# Altium PCB PI.PcbDoc
Units mm, origin at the board's own origin, x right, y up, seen from the top; angles counter-clockwise.
Board outline 35 x 51.56 mm, 2 copper layers (Top Layer, Bottom Layer); 30 components, 51 nets, 197 pads, 34 vias.
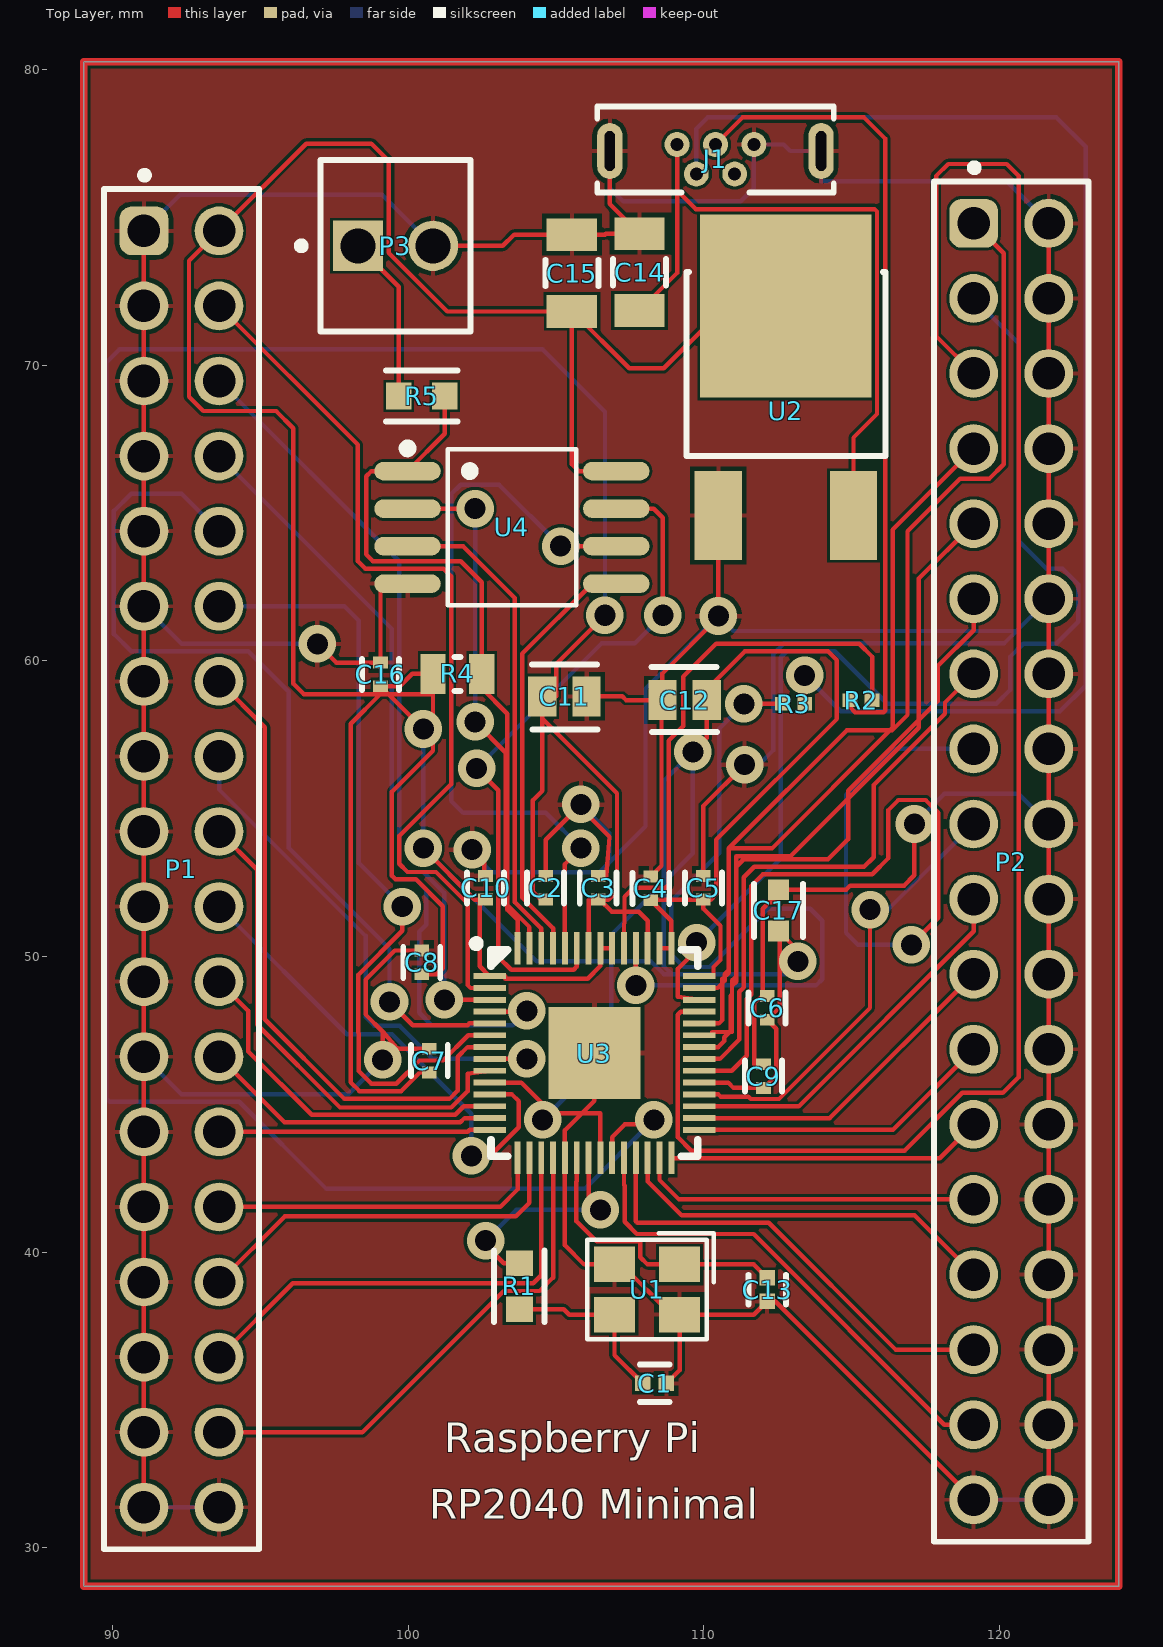
[diagram p0: Top Layer view]
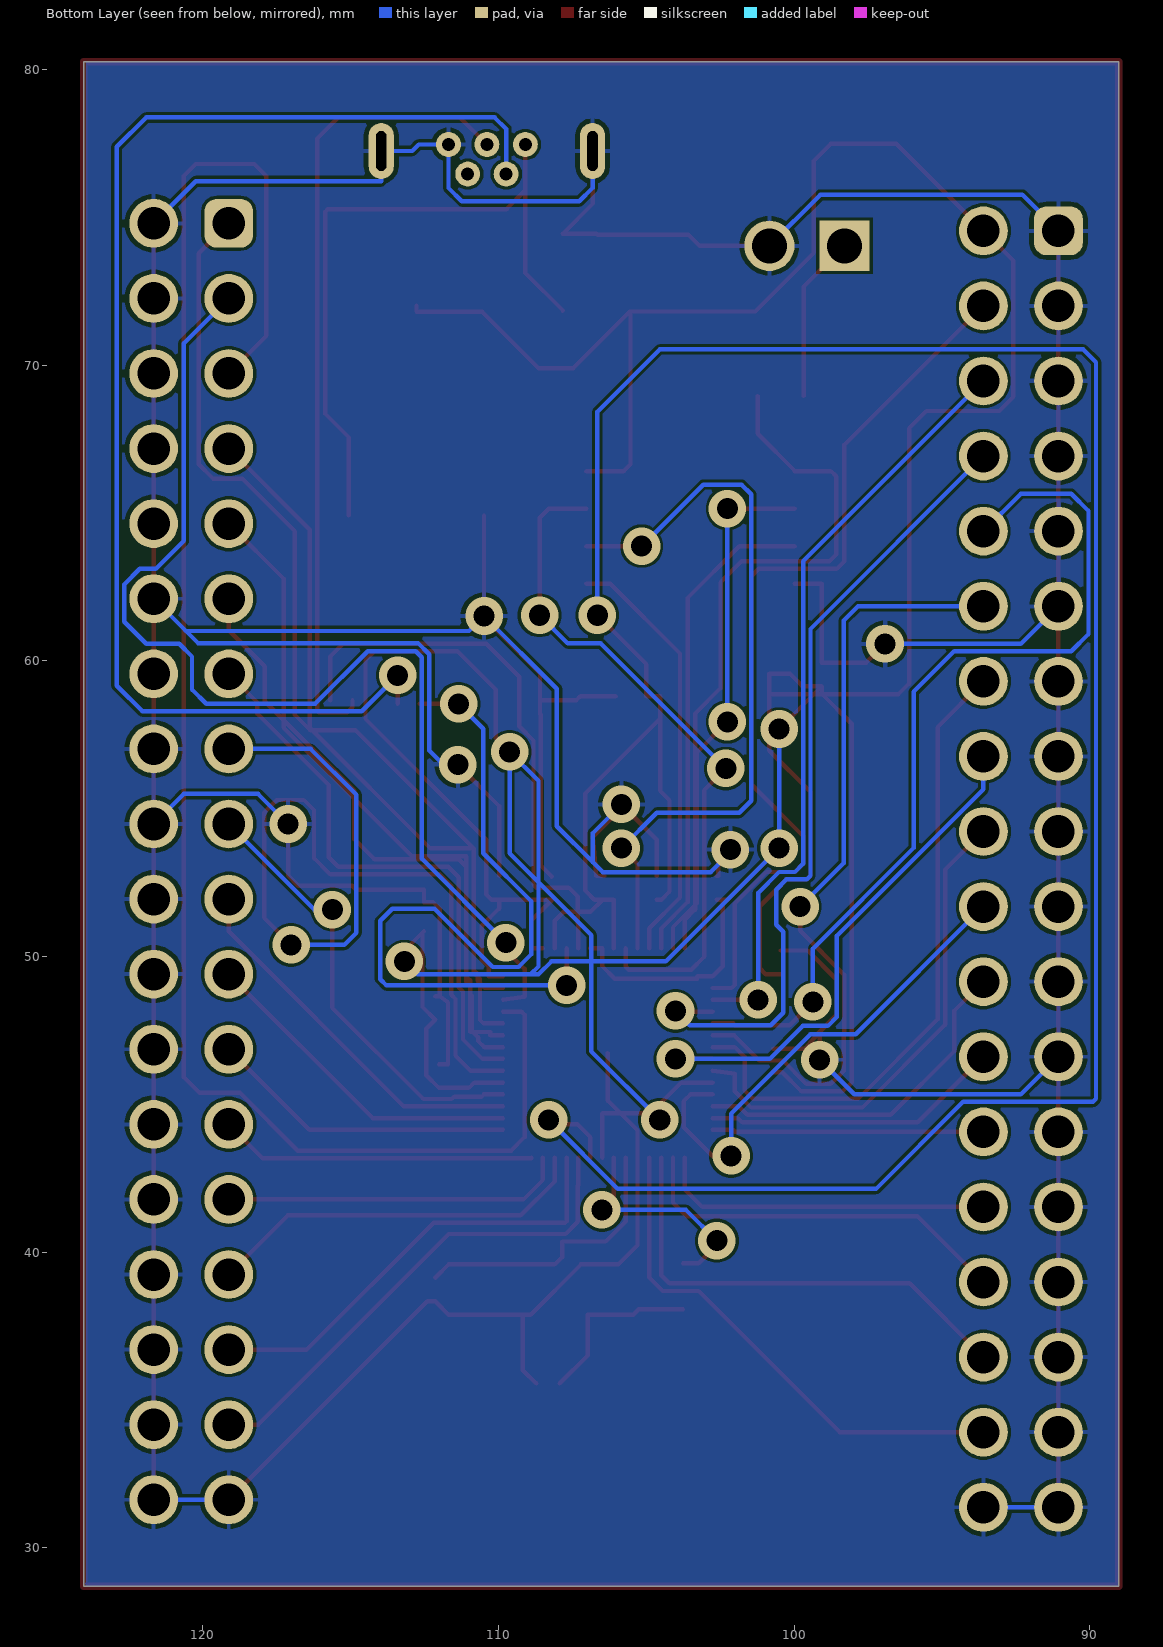
[diagram p1: Bottom Layer view, seen from below]
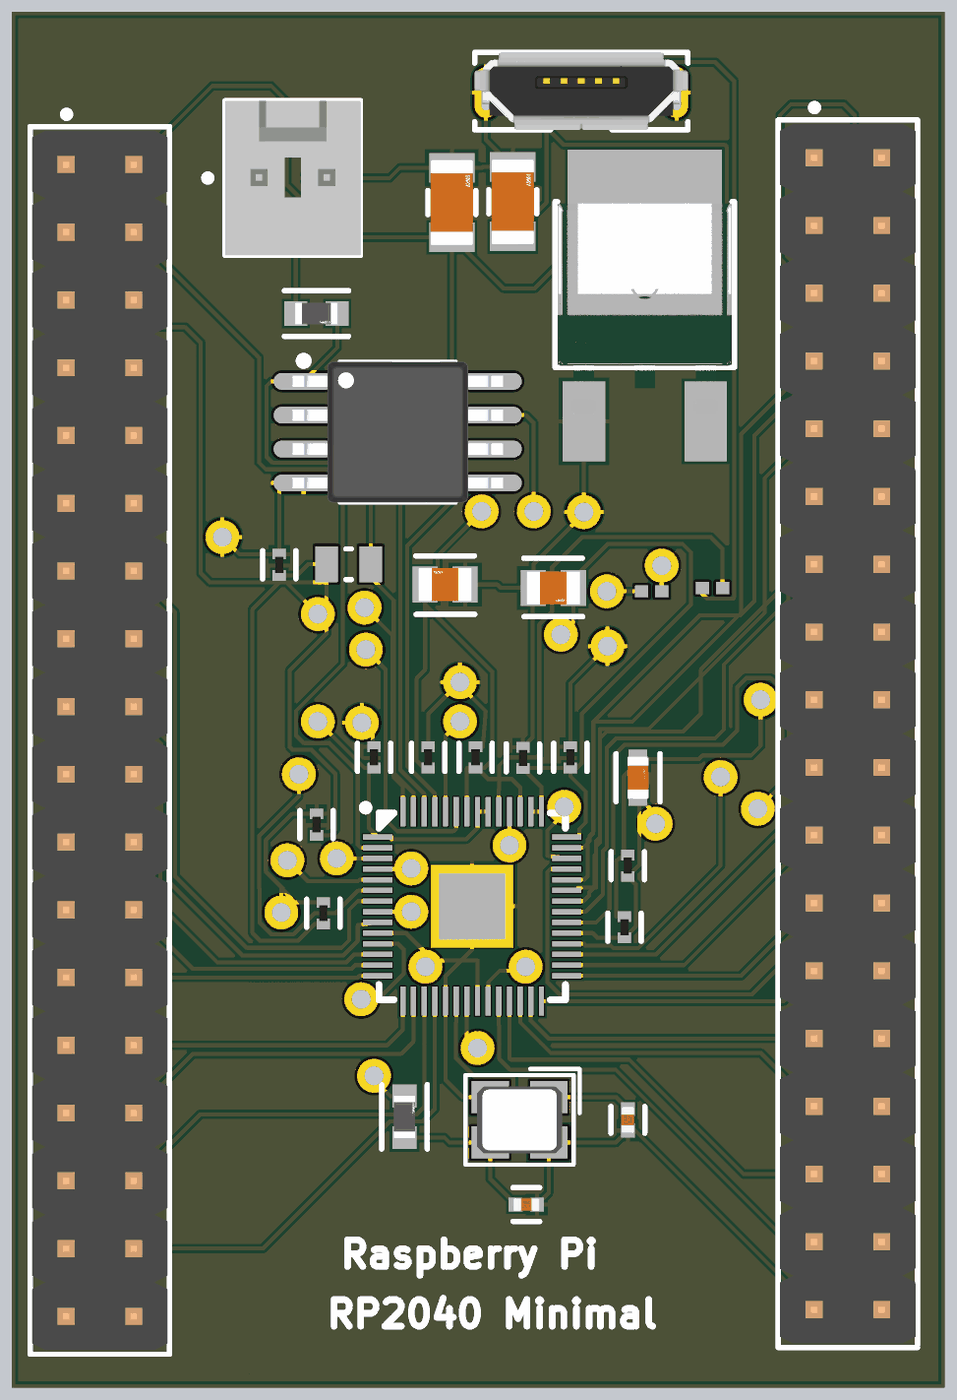
[diagram p2: 3D render of the assembled board from above, using the file's embedded part models]

## Layer stack, top to bottom
Top Solder: solder mask 0.0102, Solder Resist, Dk 3.5
Top Layer: signal copper 0.0356
Dielectric 1: dielectric 0.32, FR-4, Dk 4.8
Bottom Layer: signal copper 0.0356
Bottom Solder: solder mask 0.0102, Solder Resist, Dk 3.5

## Board outline
89.027,28.702 89.027,80.264 124.027,80.264 124.027,28.702

## Design rules (kind name [scope] priority, off if disabled: settings)
Clearance [All] p1: gap=0.1 ignorepadtopadclearanceinfootprint=FALSE
DiffPairsRouting [All] p1: maxlimit=0.254 minlimit=0.15 mostfreqgap=0.15 toplayer_minwidth=0.2 toplayer_maxwidth=0.25 toplayer_prefwidth=0.2 bottomlayer_minwidth=0.2 bottomlayer_maxwidth=0.25 bottomlayer_prefwidth=0.2 maxuncoupledlength=12.7
HoleToHoleClearance [All] p1: gap=0.15 allowstackedmicrovias=TRUE
MinimumSolderMaskSliver [All] p1: minsoldermaskwidth=0.15
PlaneClearance [All] p1: clearance=0.2
PlaneConnect [All] p1: planeconnectstyle=Direct reliefexpansion=0.508 reliefentries=4 reliefconductorwidth=0.254 reliefairgap=0.254
PolygonConnect [All] p1: connectstyle=Relief reliefconductorwidth=0.15 reliefentries=4 polygonreliefangle="90 Angle" airgapwidth=0.15
RoutingCorners [All] p1: cornerstyle=45-Degree minsetback=0.1 maxsetback=0.15
RoutingVias [All] p1: holewidth=0.711 width=1.27 viastyle="Through Hole" minholewidth=0.711 minwidth=1.27 maxholewidth=0.711 maxwidth=1.27
ShortCircuit [All] p1: allowed=TRUE
SilkToSilkClearance [All] p1: silktosilkclearance=0.15
SilkToSolderMaskClearance [IsPad] p1: minsilkscreentomaskgap=0.15 clearancetoexposedcopper=TRUE
SolderMaskExpansion [All] p1: expansion=0.102 istentingtop=FALSE
SupplyNets "Schematic Supply Nets_3" [InNet('+3v3')] p1: voltage=0.000
SupplyNets "Schematic Supply Nets_2" [InNet('VBUS')] p2: voltage=0.000
SupplyNets "Schematic Supply Nets_1" [InNet('+1v1')] p3: voltage=0.000
SupplyNets "Schematic Supply Nets" [InNet('GND')] p4: voltage=0.000
UnRoutedNet [All] p1: checkbadconnections=TRUE
Width [All] p1: maxlimit=0.2 minlimit=0.1 preferedwidth=0.15
20 further rules are at their usual default settings.

## Components (designator, comment, footprint, x,y, rotation, side; value= is the part's Value field where it differs from the comment)
C1 "15pF" FP-C0402-BB-MFG 108.331,35.56 r180 top value="15 pF"
C2 "100nF" FP-GRM15-MFG 104.648,52.324 r270 top value=0.10μF
C3 "100nF" FP-GRM15-MFG 106.426,52.324 r270 top value=0.10μF
C4 "100nF" FP-GRM15-MFG 108.204,52.305 r270 top value=0.10μF
C5 "100nF" FP-GRM15-MFG 109.982,52.324 r270 top value=0.10μF
C6 "100nF" FP-GRM15-MFG 112.141,48.26 r270 top value=0.10μF
C7 "100nF" FP-GRM15-MFG 100.711,46.482 r270 top value=0.10μF
C8 "100nF" FP-GRM15-MFG 100.457,49.803 r270 top value=0.10μF
C9 "100nF" FP-GRM15-MFG 112.014,45.955 r270 top value=0.10μF
C10 "100nF" FP-GRM15-MFG 102.616,52.324 r270 top value=0.10μF
C11 "1uF" FP-C0805C105Z4VACTU-MFG 105.283,58.801 r0 top
C12 "1uF" FP-C0805C105Z4VACTU-MFG 109.347,58.674 r180 top
C13 "15pF" FP-C0402-BB-MFG 112.141,38.735 r90 top value="15 pF"
C14 "10uF" FP-1206-L_3_2_0_2-W_1_6_0-IPC_C 107.823,73.152 r90 top
C15 "10uF" FP-1206-L_3_2_0_2-W_1_6_0-IPC_C 105.537,73.121 r90 top
C16 "100nF" FP-GRM15-MFG 99.06,59.544 r270 top value=0.10μF
C17 "10UF" FP-0603-L_1_6_0_2-W_0_8_0-MFG 112.522,51.562 r90 top
J1 "614105150721" 614105150721 110.393,77.25 r0 top
P1 "61303621121" 61303621121 92.329,52.959 r270 top
P2 "61303621121" 61303621121 120.396,53.213 r270 top
P3 "22-27-2021" MOLX-22-27-2021_V 99.568,74.041 r0 top
R1 "1k" FP-AC0603-IPC_B 103.759,38.847 r90 top
R2 "27 ohm" RESC1005X40X25LL05T10 115.316,58.674 r180 top
R3 "27 ohm" RESC1005X40X25LL05T10 113.036,58.547 r0 top
R4 "DNF" RESC2013X50X30LL20T20 101.663,59.563 r180 top
R5 "1k" FP-AC0603-IPC_B 100.457,68.961 r0 top
U1 "ABM8-272-T3" CRYSTAL-SMD_4P-L3.2-W2.5-BL 108.077,38.735 r180 top
U2 "NCP1117DT33RKG" FP-369C-MFG 112.776,69.219 r0 top
U3 "RP2040" LQFN-56_L7.0-W7.0-P0.4-EP 106.299,46.736 r0 top
U4 "W25Q128JVSIQ" SOIC-8_L5.3-W5.3-P1.27-LS8.0-BL 103.505,64.516 r270 top

## Footprints (in the part's own frame and the unit in brackets; to place one, negate y for a bottom-side part, rotate by r counter-clockwise, add the part's x,y. Pads: shape width x height; smd on the part's side, far side on the other; paste and mask are expansions set on the pad)
61303621121 [mm] "Pin Header, pitch 2.54 mm, THT, Vertical, dual row, 36p"
  rrect50% 1.65x1.65 hole 1.1: 1(-21.59,-1.27)
  round 1.65 hole 1.1: 2(-21.59,1.27) 3(-19.05,-1.27) 4(-19.05,1.27) 5(-16.51,-1.27) 6(-16.51,1.27) 7(-13.97,-1.27) 8(-13.97,1.27) 9(-11.43,-1.27) 10(-11.43,1.27) 11(-8.89,-1.27) 12(-8.89,1.27) 13(-6.35,-1.27) 14(-6.35,1.27) 15(-3.81,-1.27) 16(-3.81,1.27) 17(-1.27,-1.27) 18(-1.27,1.27) 19(1.27,-1.27) 20(1.27,1.27) 21(3.81,-1.27) 22(3.81,1.27) 23(6.35,-1.27) 24(6.35,1.27) 25(8.89,-1.27) 26(8.89,1.27) 27(11.43,-1.27) 28(11.43,1.27) 29(13.97,-1.27) 30(13.97,1.27) 31(16.51,-1.27) 32(16.51,1.27) 33(19.05,-1.27) 34(19.05,1.27) 35(21.59,-1.27) 36(21.59,1.27)
  silkscreen extent -23.59,-2.61 23.01,2.61, body extent -22.86,-2.54 22.86,2.54, height 8.59
614105150721 [mm] "Micro USB 2.0 Type B Vertical 5 Contacts"
  round 0.84 hole 0.44: 1(-1.3,0.22) 2(-0.65,-0.78) 3(0,0.22) 4(0.65,-0.78) 5(1.3,0.22)
  oval 0.85x1.9 hole 0.35 slot 1.35 at 90 deg: Shell(-3.575,0) Shell(3.575,0)
  silkscreen extent -4,-1.4 4,1.5, body extent -4,-1.4 4,1.5, height 5.64
CRYSTAL-SMD_4P-L3.2-W2.5-BL [mm]
  rect 1.4x1.2 smd: 1(-1.1,-0.85) 2(1.1,-0.85) 3(1.1,0.85) 4(-1.1,0.85)
  silkscreen extent -2.26,-1.91 2.03,1.68, body extent -1.6,-1.25 1.6,1.25, height 0.7
FP-369C-MFG [mm]
  rect 1.6x3 smd paste+0 mask+0: 1(-2.285,-4.3) 3(2.285,-4.3)
  rect 5.8x6.2 smd paste+0 mask+0: 4(0,2.79)
  silkscreen extent -3.36,-2.29 3.36,3.93, body extent -3.46,-5.9 3.46,5.99, height 0.25
FP-0603-L_1_6_0_2-W_0_8_0-MFG [mm]
  rect 0.7x0.7 smd paste+0 mask+0: 1(-0.7,0) 2(0.7,0)
  silkscreen extent -0.9,-0.82 0.9,0.82, body extent -1.15,-0.6 1.15,0.6, height 0.25
FP-1206-L_3_2_0_2-W_1_6_0-IPC_C [mm]
  rect 1.105x1.706 smd paste+0 mask+0: 1(-1.301,0) 2(1.301,0)
  silkscreen extent -0.45,-0.9 0.45,0.9, body extent -1.95,-1 1.95,1, height 0.25
FP-AC0603-IPC_B [mm]
  rect 0.859x0.912 smd paste+0 mask+0: 1(-0.777,0) 2(0.777,0)
  silkscreen extent -1.21,-0.86 1.21,0.86, body extent -1.46,-0.71 1.46,0.71, height 0.25
FP-C0402-BB-MFG [mm]
  rect 0.52x0.52 smd paste+0 mask+0: 1(-0.4,0) 2(0.4,0)
  silkscreen extent -0.5,-0.64 0.5,0.64, body extent -0.8,-0.4 0.8,0.4, height 0.25
FP-C0805C105Z4VACTU-MFG [mm]
  rect 0.95x1.35 smd paste+0 mask+0: 1(-0.75,0) 2(0.75,0)
  silkscreen extent -1.1,-1.11 1.11,1.07, body extent -1.4,-0.85 1.4,0.85, height 0.25
FP-GRM15-MFG [mm]
  rect 0.4x0.5 smd paste+0 mask+0: 1(-0.4,0) 2(0.4,0)
  silkscreen extent -0.53,-0.62 0.53,0.62, body extent -0.7,-0.38 0.7,0.38, height 0.25
LQFN-56_L7.0-W7.0-P0.4-EP [mm]
  rect 1.1x0.2 smd paste-100 mask+0.05: 1(-3.55,2.6) 2(-3.55,2.2) 3(-3.55,1.8) 4(-3.55,1.4) 5(-3.55,1) 6(-3.55,0.6) 7(-3.55,0.2) 8(-3.55,-0.2) 9(-3.55,-0.6) 10(-3.55,-1) 11(-3.55,-1.4) 12(-3.55,-1.8) 13(-3.55,-2.2) 14(-3.55,-2.6) 29(3.55,-2.6) 30(3.55,-2.2) 31(3.55,-1.8) 32(3.55,-1.4) 33(3.55,-1) 34(3.55,-0.6) 35(3.55,-0.2) 36(3.55,0.2) 37(3.55,0.6) 38(3.55,1) 39(3.55,1.4) 40(3.55,1.8) 41(3.55,2.2) 42(3.55,2.6)
  rect 0.2x1.1 smd paste-100 mask+0.05: 15(-2.6,-3.55) 16(-2.2,-3.55) 17(-1.8,-3.55) 18(-1.4,-3.55) 19(-1,-3.55) 20(-0.6,-3.55) 21(-0.2,-3.55) 22(0.2,-3.55) 23(0.6,-3.55) 24(1,-3.55) 25(1.4,-3.55) 26(1.8,-3.55) 27(2.2,-3.55) 28(2.6,-3.55) 43(2.6,3.55) 44(2.2,3.55) 45(1.8,3.55) 46(1.4,3.55) 47(1,3.55) 48(0.6,3.55) 49(0.2,3.55) 50(-0.2,3.55) 51(-0.6,3.55) 52(-1,3.55) 53(-1.4,3.55) 54(-1.8,3.55) 55(-2.2,3.55) 56(-2.6,3.55)
  rect 3.1x3.1 smd paste-100 mask+0.05: 57(0,0)
  silkscreen extent -4.13,-3.5 3.5,3.83
MOLX-22-27-2021_V [mm] "Header, 2-Leads, Body 5.8x5.08mm"
  rect 1.7x1.7 hole 1.19: 1(-1.27,0)
  round 1.7 hole 1.19: 2(1.27,0)
  silkscreen extent -3.31,-2.9 2.54,2.9, body extent -2.54,-2.9 2.54,2.9, height 11.72
RESC1005X40X25LL05T10 [mm] "Chip Resistor, 2-Leads, Body 1.00x0.50mm, IPC High Density"
  rect 0.5x0.45 smd: 1(-0.375,0) 2(0.375,0)
  body extent -0.53,-0.27 0.53,0.28, height 0.4
RESC2013X50X30LL20T20 [mm] "Chip Resistor, 2-Leads, Body 2.00x1.25mm, IPC High Density"
  rect 0.85x1.35 smd: 1(-0.825,0) 2(0.825,0)
  silkscreen extent -0.1,-0.58 0.1,0.58, body extent -1.1,-0.72 1.1,0.72, height 0.5
SOIC-8_L5.3-W5.3-P1.27-LS8.0-BL [mm]
  oval 0.63x2.25 smd: 1(-1.905,-3.53) 2(-0.635,-3.53) 3(0.635,-3.53) 4(1.905,-3.53) 5(1.905,3.53) 6(0.635,3.53) 7(-0.635,3.53) 8(-1.905,3.53)
  silkscreen extent -2.82,-3.68 2.64,2.18, body extent -2.64,-3.95 2.64,3.95, height 2.16

## Part data
C1 C13: library part CMP-1034-00802-4, "CAP CER 15PF 16V 5% NP0 0402", Capacitance="15 pF", Manufacturer=Kemet, Manufacturer Part Number=C0402C150J4GACTU, Package=C0402-BB, Temperature="-55°C to +125°C", Temperature Characteristic=C0G, Temperature Coefficient=15%, Temperature Range High=+125°C, Temperature Range Low=-55°C, Tolerance=0.05, Voltage Rating="16 V", Automotive=No, Category=Cap, ComponentLink2Description=Datasheet, ComponentLink2URL=https://content.kemet.com/datasheets/KEM_C1002_X7R_SMD.pdf, Device Class L1="Passive Components", Device Class L2=Capacitors, Device Class L3="Ceramic Capacitors", Digikey Description="CAP CER 15PF 16V 5% NP0 0402", Height=0.55mm, Ipc Land Pattern Name=CAPC10050X50, Lead Free=Yes, Material=Ceramic, Mouser Description="Multilayer Ceramic Capacitors MLCC - SMD/SMT 16volts 15pF C0G 5%", Octopart=https://octopart.com/c0402c150j4gactu-kemet-9140080, RoHS=TRUE
C2 C3 C4 C5 C6 C7 C8 C9 C10 C16: library part CMP-2100-03641-2, "CAP CER 0.1UF 16V X7R 0402", Capacitance=0.10μF, Manufacturer=Murata, Manufacturer Part Number=GRM155R71C104KA88D, Package=GRM15, Temperature="-55°C to +125°C", Temperature Characteristic=X7R, Temperature Range High=+125°C, Temperature Range Low=-55°C, Tolerance=10%, Voltage Rating=16Vdc, Category=Cap, ComponentLink2Description=Datasheet, ComponentLink2URL=https://search.murata.co.jp/Ceramy/image/img/A01X/G101/ENG/GRM155R71H471KA01-01A.pdf, Device Class L1="Passive Components", Device Class L2=Capacitors, Device Class L3="Ceramic Capacitors", Digikey Description="CAP CER 0.1UF 16V X7R 0402", Height=0.55mm, Ipc Land Pattern Name=CAPC10050X219, Lead Free=yes, Material=Ceramic, Mouser Description="0402 0.1 uF 16V ±10 % Tolerance X7R SMT Multilayer Ceramic Capacitor", Octopart=https://octopart.com/grm155r71c104ka88d-murata-196880, RoHS=TRUE, Standoff Height=0mm
C11 C12: library part CMP-2007-03241-2, "CAP CER 1UF 16V Y5V 0805", Case Code (Imperial)=0805, Case Code (Metric)=2012, Dielectric=Y5V, Dielectric Material=Ceramic, Max Operating Temperature=85°C, Min Operating Temperature=-30°C, Package Quantity=1, Tolerance=80%, Voltage=16V, Capacitance=1uF, Case/Package=0805, Construction=Flat, Contact Material=Tin, Depth=1.25mm, Dissipation Factor=7%, Height=1.25mm, Lead Free="Lead Free", Lead Pitch=0.75mm, Length=2mm, Mount="Surface Mount", Number of Pins=2, Packaging="Tape and Reel", Radiation Hardening=No, REACH SVHC="No SVHC", RoHS Compliant=Yes, Series=C, Termination=SMD/SMT, Thickness=0.055inch, Voltage Rating=16V, Voltage Rating (DC)=16V, Width=0.049inch
C14 C15: library part CMP-1661-00005-2, "General Purpose Ceramic Capacitor, 1206, 10uF, 10%, X7R, 15%, 16V", Case Code (Imperial)=1206, Case Code (Metric)=3216, Dielectric=X7R, Max Operating Temperature=125°C, Min Operating Temperature=-55°C, Package Quantity=2500, Tolerance=10%, Voltage=16V, Capacitance=10uF, Case/Package=1206, Construction=Flat, Depth=1.6mm, Dissipation Factor=3.5%, Height=1.78mm, Lead Free="Lead Free", Length=3.2mm, Mount="Surface Mount", Number of Pins=2, Packaging="Tape and Reel", Radiation Hardening=No, REACH SVHC="No SVHC", RoHS Compliant=Yes, Series=-, Termination=SMD/SMT, Thickness=0.07inch, Voltage Rating=16V, Voltage Rating (DC)=16V, Width=0.063inch
C17: library part CMP-2000-06226-4, "Multilayer Ceramic Capacitor 10uF 16V X5R 20% SMD 0603 T/R", Capacitance=10uF, Case Code (Imperial)=0603, Case Code (Metric)=1608, Dielectric=X5R, Max Operating Temperature=85°C, Min Operating Temperature=-55°C, Package Quantity=1, Tolerance=20%, Voltage Rating=16V, Case/Package=0603, Construction=Flat, Halogen Free="Halogen Free", Height=0.8mm, Length=0.063inch, Mount="Surface Mount", Packaging="Tape and Reel", RoHS Compliant=Yes, Series=M, Termination=SMD/SMT, Thickness=0.031inch, Voltage Rating (DC)=16V, Width=0.031inch
J1: library part CMP-1502-03250-2, Contact Resistance=30mΩ, Current Rating=1.8A, Insulation Resistance=1GΩ, Max Operating Temperature=85°C, Min Operating Temperature=-40°C, Operating Supply Voltage=30V, Connector Type=USB, Contact Material=Gold, Contact Plating=Gold, Features=Shielded, Gender=Receptacle, Height=5.81mm, Lead Free="Lead Free", Mount="Through Hole, Vertical", NexarPartId=52645111, Number of Contacts=5, Number of Pins=5, Orientation=Vertical, Packaging="Tape and Reel", REACH SVHC=Unknown, RoHS=Compliant, USB Standard="USB 2.0", Voltage Rating=30V
P1 P2: library part CMP-1502-01131-3, Color=Black, Contact Resistance=20mΩ, Current Rating=3A, Operating Supply Voltage=250V, Connector Type="Male Pin", Contact Material=Copper, Contact Mating Length=5.9944mm, Contact Plating=Gold, Gender=Male, Lead Pitch=2.54mm, Mount="Through Hole", NexarPartId=32855576, Number of Contacts=36, Number of Pins=36, Number of Positions=36, Number of Rows=2, Orientation=Vertical, Packaging=Bulk, Pitch=2.54mm, REACH SVHC=Unknown, RoHS=Compliant, Row Spacing=2.54mm, Termination=Solder
P3: library part CMP-2000-05537-1, "Male Header, Pitch 2.54 mm, 1 x 2 Position, Height 11.7 mm, Tail Length 3.56 mm, 0 to 75 degC, RoHS, Bulk", Current - Max=4A, Manufacturer=Molex, Operating temperature=0°Cto+75°C, Package Description="2-Leads Header, Body 5.08 x 5.8 mm, Pitch 2.54 mm", Package Version="Rev. BC, 02/2012", PartNumber=0022272021, Voltage - Max=250V, Contact Material=Tinplatedbrass, Current Rating=4A, Datasheet URL=http://www.molex.com/pdm_docs/sd/022272021_sd.pdf, Datasheet Version="Rev. F, 06/2009", Housing material=Nylon(UL94V-0), Manufacturer URL=http://www.molex.com/, Mounting Technology=ThroughHole, No. of Positions=2, No. of Rows=1, Orientation=Vertical, Package Reference=22-27-2021, Pitch=2.54mm, Voltage Rating=250V
R1 R5: library part CMP-2000-04828-3, "RES 1kΩ 1.00% 0.1W 0603", Case Code (Imperial)=0603, Case Code (Metric)=1608, Max Operating Temperature=155°C, Max Power Dissipation=100mW, Min Operating Temperature=-55°C, Package Quantity=1, Ratings=AEC-Q200, Resistance=1kR, Resistor Type="Thick Film", Temperature Coefficient=100ppm/°C, Tolerance=1%, Voltage Rating=50V, Case/Package=0603, Construction=Rectangular, Depth=0.8mm, Features="Moisture Resistant", Height=0.022inch, Lead Free="Lead Free", Length=0.063inch, Military Standard=Not, Number of Terminations=2, Packaging="Tape and Reel", Power Rating=100mW, RoHS Compliant=Yes, Series=AC, Size Code=0603, Termination=SMD/SMT, Width=0.031inch
R2 R3: library part CMP-2002-07055-1, Manufacturer="Yageo / Phycomp", Part Number=RC0402FR-0727RL
R4: library part CMP-2001-04896-1, Manufacturer="Vishay Dale", Part Number=CRCW08050000Z0EA
U1: library part ABM8-272-T3_C20625731, JLCPCB Part Class="Extended Part", Manufacturer=ABRACON, Add into BOM=yes, Convert to PCB=yes, Datasheet=https://atta.szlcsc.com/upload/public/pdf/source/20240227/A8BE43F636D80F75C9AF5C59EDF21E9A.pdf, Device=ABM8-272-T3_C20625731, LCSC Part Name=ABM8-272-T3, Manufacturer Part=ABM8-272-T3, Supplier=LCSC, Supplier Footprint=SMD3225-4P, Supplier Part=C20625731, Symbol=ABM8-272-T3_C20625731
U2: library part CMP-07128-000036-1, "IC REG LINEAR 3.3V 1A DPAK-3", Case/Package=DPAK, Current Rating=1A, Dropout Voltage=1.07V, Input Bias Current=6mA, Max Input Voltage=20V, Max Operating Temperature=125°C, Min Input Voltage=10V, Min Operating Temperature=0°C, Min Output Voltage=3.3V, Output Voltage Accuracy=1%, Package Quantity=1, Quiescent Current=10mA, Reference Voltage=1.27V, Accuracy=1%, Contact Plating=Tin, Halogen Free="Halogen Free", Height=2.38mm, Lead Free="Lead Free", Length=6.73mm, Max Output Current=1A, Min Current Limit=1A, Mount="Surface Mount", Nominal Output Voltage=3.3V, Number of Outputs=1, Number of Pins=3, Number of Regulators=1, Output Current=1A, Output Type=Fixed, Output Voltage=3.3V, Packaging="Tape and Reel", Polarity=Positive, Radiation Hardening=No, REACH SVHC="No SVHC", Width=6.22mm
U3: library part RP2040_C2040, JLCPCB Part Class="Extended Part", LCSC Part Name=RP2040（RP2B2）, Manufacturer="Raspberry Pi(树莓派)", ADC (Bit)=12bit, Add into BOM=yes, Applications=-, Convert to PCB=yes, CPU Core=-, CPU Maximum Speed=133MHz, Datasheet=https://atta.szlcsc.com/upload/public/pdf/source/20210621/C2040_96F425825606B7957D87DD32E2512CA9.pdf, Device=RP2040_C2040, Manufacturer Part=RP2040, Number of I/O=30, Supplier=LCSC, Supplier Footprint=LQFN-56(7x7), Supplier Part=C2040, Symbol=RP2040
U4: Clock Frequency (fc)=133MHz, JLCPCB Part Class="Basic Part", LCSC Part Name="W25Q128JVSIQ 编带", Manufacturer=WINBOND(华邦), Operating temperature=-40℃~+85℃, Supply Voltage=2.7V~3.6V, Add into BOM=yes, Block Erase Time (tBE)=120ms@(32KB), Convert to PCB=yes, Data Retention - TDR (Year)="20 years", Datasheet=https://atta.szlcsc.com/upload/public/pdf/source/20170316/1489627409956.pdf, Device=W25Q128JVSIQ, Interface Type=SPI, Manufacturer Part=W25Q128JVSIQ, Memory Size=128Mbit, Page Programming Time (Tpp)=700us, Supplier=LCSC, Supplier Footprint=SOIC-8-208mil, Supplier Part=C97521, Symbol=W25Q128JVSIQTR

## Via types
v1: diameter 1.27, hole 0.711, Top Layer to Bottom Layer, 34 vias

## Nets (pads, with @x,y where several pads share a name; then routed paths per layer and width w, separated by ;. In a path a pad name is that pad's centre, name@x,y a point inside that pad or via, vN(x,y) a via of type N, cw(c..) or ccw(c..) an arc to the next point about the centre after c; other vN are vias at no path point)
+1v1: C2.2 C3.2 C11.1 U3.23 U3.45 U3.50 | length 96.5
  Top Layer w0.15: C2.2 104.489,51.924 104.216,52.197 104.216,55.284 104.533,55.601 104.533,58.052 ; U3.50 106.099,51.924 C3.2 C3.2@106.477,51.924 ; v1(106.655,61.544) 105.004,59.893 105.004,58.801 C11.1 104.533,58.052 ; U3.23 106.899,43.891 107.331,44.323 108.204,44.323 108.306,44.425 v1(108.306,44.475) ; U3.45 108.099,51.206 107.794,51.511 106.89,51.511 C3.2@106.477,51.924 ; 104.533,58.052 107.061,55.524 107.061,52.222 106.763,51.924 C3.2@106.477,51.924
  Bottom Layer w0.15: v1(106.655,61.544) 106.655,68.428 104.546,70.536 90.221,70.536 89.789,70.104 89.789,45.187 89.891,45.085 94.285,45.085 97.231,42.139 105.969,42.139 v1(108.306,44.475)
+3v3: C4.2 C5.2 C6.2 C7.2 C8.2 C9.2 C10.2 C12.1 C15.1 C16.2 C17.1 P1.2 R4.2 U2.4 U3.1 U3.10 U3.22 U3.33 U3.42 U3.43 U3.44 U3.48 U3.49 U4.8 | length 182.1
  Top Layer w0.15: C8.2 100.966,49.403 101.168,49.605 101.168,51.703 100.261,52.61 99.568,52.61 99.448,52.73 99.448,55.575 100.838,56.965 100.838,58.877 ; v1(100.508,53.67) 102.254,51.924 C10.2@102.416,51.924 ; v1(100.508,57.696) 99.327,58.877 ; C7.2 100.399,46.082 99.765,45.447 98.349,45.447 98.055,45.741 98.055,57.872 99.06,58.877 ; C10.2 C10.2@102.416,51.924 ; U3.10 103.819,45.736 104.546,45.009 v1@104.546,44.704 ; v1(104.546,44.475) v1@104.546,44.704 ; U3.22 106.499,44.704 v1@104.546,44.704 ; U3.48 U3.49 106.499,49.679 106.07,49.251 103.276,49.251 103.276,49.336 U3.1 102.416,49.669 C10.2@102.416,51.924 ; U4.8 105.766,66.421 105.537,66.65 C15.1 ; U3.44 U3.43 108.899,51.21 C4.2 108.255,51.905 108.274,51.924 C5.2 ; v1(109.626,56.921) 110.097,57.392 C12.1 110.097,59.03 111.39,60.322 114.198,60.322 114.5,60.02 114.5,58.038 110.412,53.95 110.412,52.1 110.236,51.924 C5.2 ; U3.33 110.82,45.736 111.001,45.555 C9.2 112.446,45.987 112.446,47.555 C6.2 112.573,48.292 C17.1@112.573,50.811 ; U3.42 110.326,49.336 110.326,49.646 110.563,49.883 110.563,51.04 109.982,51.621 C5.2 ; C17.1 C17.1@112.573,50.811 ; U2.4 112.776,71.806 110.552,71.806 108.647,69.901 107.478,69.901 105.559,71.82 C15.1 ; v1(113.182,49.835) 113.182,50.202 C17.1@112.573,50.811 ; 99.06,58.877 99.327,58.877 ; 99.06,58.877 96.469,58.877 96.114,59.233 96.114,67.869 95.529,68.453 93.066,68.453 92.583,68.936 92.583,73.533 P1.2 96.545,77.495 98.755,77.495 99.339,76.911 99.339,73.802 101.321,71.82 C15.1 ; 99.06,58.877 C16.2 ; C16.2 99.327,58.877 ; C16.2 99.72,59.144 100.139,59.563 R4.2 100.838,58.877 ; 99.327,58.877 100.838,58.877
  Bottom Layer w0.15: v1(100.508,57.696) v1(100.508,53.67) 104.343,49.835 106.861,49.835 ; v1(104.546,44.475) 106.861,46.79 106.861,49.835 ; v1(113.182,49.835) 112.743,49.396 108.915,49.396 ; 106.861,49.835 106.861,50.727 108.649,52.515 ; 106.861,49.835 108.21,49.835 108.649,49.396 108.915,49.396 ; 108.649,52.515 109.626,53.492 v1(109.626,56.921) 108.649,55.944 108.649,52.515 ; 108.649,52.515 108.649,49.662 108.915,49.396
GND: C1.1 C2.1 C3.1 C4.1 C5.1 C6.1 C7.1 C8.1 C9.1 C10.1 C11.2 C12.2 C13.1 C14.2 C15.2 C16.1 C17.2 J1.5 J1.Shell P1.1 P1.3 P1.5 P1.7 P1.9 P1.11 P1.13 P1.15 P1.17 P1.19 P1.21 P1.23 P1.25 P1.27 P1.29 P1.31 P1.33 P1.35 P1.36 P2.2 P2.4 P2.6 P2.8 P2.10 P2.12 P2.14 P2.16 P2.18 P2.20 P2.22 P2.24 P2.26 P2.28 P2.30 P2.32 P2.34 P2.35 P2.36 P3.2 U1.2 U1.4 U2.1 U3.19 U3.57 U4.4 | length 276.6
  Top Layer w0.15: P1.35 P1.33 P1.31 P1.29 P1.27 P1.25 P1.23 P1.21 P1.19 P1.17 P1.15 P1.13 P1.11 P1.9 P1.7 P1.5 P1.3 P1.1 ; v1(96.926,60.579) 97.561,59.944 C16.1 99.06,62.611 U4.4 ; v1(99.136,46.507) 99.136,47.46 ; C8.1 99.542,50.203 98.555,49.216 98.555,48.041 99.136,47.46 ; C7.1 99.628,46.882 99.606,46.907 99.136,47.46 ; P3.2 103.2,74.041 103.581,74.422 C15.2 106.655,74.422 106.685,74.453 C14.2 106.818,75.458 J1.Shell@106.818,77.25 ; v1(102.159,53.619) 102.565,53.213 102.565,52.724 C10.1 ; C2.1 104.648,53.95 v1@105.562,54.864 ; v1(105.842,55.143) v1@105.562,54.864 ; C11.2 107.239,58.801 107.366,58.674 C12.2 ; U3.57 106.299,45.12 105.299,44.12 U3.19 105.299,40.234 105.948,39.585 U1.2 107.213,39.585 108.913,37.885 U1.4 ; C3.1 106.699,52.724 106.807,54.051 105.994,54.864 v1@105.562,54.864 ; C4.1 108.566,53.067 108.566,58.18 108.597,58.18 C12.2 ; C1.1 109.177,36.006 U1.4 ; C5.1 109.982,55.093 v1(111.379,56.49) ; U2.1 v1(110.491,61.519) 110.491,61.467 108.597,59.573 C12.2 ; C9.1 111.709,46.355 111.709,48.455 C6.1@111.989,48.66 ; C6.1 C6.1@111.989,48.66 ; v1(117.119,54.483) 117.119,52.745 116.772,52.397 114.946,52.397 114.811,52.262 C17.2 112.522,51.841 112.217,51.841 111.989,51.613 C6.1@111.989,48.66 ; P2.35 112.414,38.335 C13.1 111.691,37.885 U1.4 ; P2.36 P2.34 P2.32 P2.30 P2.28 P2.26 P2.24 P2.22 P2.20 P2.18 P2.16 P2.14 P2.12 P2.10 P2.8 P2.6 P2.4 P2.2
  Bottom Layer w0.15: P1.35 P1.36 ; P1.23 92.329,45.339 97.968,45.339 v1(99.136,46.507) ; P1.11 92.329,60.579 v1(96.926,60.579) ; P1.1 92.278,75.768 99.111,75.768 P3.2 ; v1(102.159,53.619) 102.108,53.569 102.819,52.857 106.477,52.857 106.807,53.188 ; v1(105.842,55.143) 106.807,54.178 106.807,53.188 ; J1.Shell@106.818,77.25 106.818,75.997 107.266,75.549 111.245,75.549 111.693,75.997 J1.5 112.7,77.47 112.92,77.25 113.968,77.25 113.968,76.225 120.244,76.225 P2.2 ; v1(111.379,56.49) 111.862,56.49 112.341,56.969 112.341,60.221 112.725,60.604 120.167,60.604 120.574,61.011 ; v1(117.119,54.483) 118.135,55.499 120.65,55.499 P2.18 ; P2.35 P2.36 ; P2.12 120.574,61.011 ; 106.807,53.188 108.026,54.407 108.026,59.054 v1(110.491,61.519) 110.999,61.011 120.574,61.011
GPI00: P1.4 U3.2 | length 30.8
  Top Layer w0.15: P1.4 98.298,67.31 98.298,63.373 98.552,63.119 101.194,63.119 101.448,62.865 101.448,55.829 99.698,54.079 99.698,53.137 99.974,52.86 100.94,52.86 102.006,51.793 102.006,49.038 102.108,48.936 U3.2
GPI01: P1.6 U3.3 | length 25.9
  Top Layer w0.15: v1(101.219,48.536) U3.3
  Bottom Layer w0.15: P1.6 99.698,63.37 99.698,53.137 99.974,52.86 100.511,52.86 101.219,52.152 v1(101.219,48.536)
GPI02: P1.8 U3.4 | length 27.5
  Top Layer w0.15: U3.4 103.991,48.136 v1(104.013,48.158)
  Bottom Layer w0.15: P1.8 99.448,61.08 99.448,52.73 99.568,52.61 100.261,52.61 100.609,52.261 100.609,51.077 100.368,50.835 100.368,48.098 100.787,47.679 103.533,47.679 v1(104.013,48.158)
GPI03: P1.10 U3.5 | length 30.9
  Top Layer w0.15: v1(99.365,48.463) 100.152,47.676 102.006,47.676 102.067,47.736 U3.5
  Bottom Layer w0.15: P1.10 92.329,65.659 90.627,65.659 90.043,65.075 90.043,60.909 90.627,60.325 94.59,60.325 95.961,58.953 95.961,53.67 99.365,50.267 v1(99.365,48.463)
GPI04: P1.12 U3.6 | length 26.7
  Top Layer w0.15: v1(99.797,51.689) 99.797,50.869 98.305,49.378 98.305,47.425 98.326,47.403 98.326,46.126 98.755,45.697 99.596,45.697 100.381,46.482 101.178,46.482 102.032,47.336 U3.6
  Bottom Layer w0.15: P1.12 97.841,61.849 98.323,61.366 98.323,53.162 v1(99.797,51.689)
GPI05: P1.14 U3.7 | length 22.2
  Top Layer w0.15: P1.14 95.148,57.76 95.148,47.875 97.841,45.183 101.393,45.183 101.676,45.466 101.676,46.606 102.006,46.936 U3.7
GPI06: P1.16 U3.8 | length 18.2
  Top Layer w0.15: U3.8 v1(104.013,46.536)
  Bottom Layer w0.15: P1.16 93.599,55.651 98.555,50.696 98.555,47.955 98.857,47.653 99.71,47.653 100.827,46.536 v1(104.013,46.536)
GPI07: P1.18 U3.9 | length 16.9
  Top Layer w0.15: P1.18 94.894,52.934 94.894,47.69 97.691,44.894 101.457,44.894 102.006,45.443 102.006,46.034 U3.9
GPI08: P1.20 U3.11 | length 16.8
  Top Layer w0.15: v1(102.133,43.256) 102.769,43.256 103.734,44.221 103.734,45.11 103.508,45.336 U3.11
  Bottom Layer w0.15: P1.20 97.919,47.369 99.449,47.369 102.133,44.685 v1(102.133,43.256)
GPI09: P1.22 U3.12 | length 11.9
  Top Layer w0.15: P1.22 94.59,48.158 94.59,46.787 96.733,44.644 101.587,44.644 101.879,44.936 U3.12
GPI010: P1.24 U3.13 | length 10.1
  Top Layer w0.15: P1.24 95.814,44.394 101.762,44.394 101.905,44.536 U3.13
GPI011: P1.26 U3.14 | length 9.2
  Top Layer w0.15: P1.26 102.012,44.069 102.079,44.136 U3.14
GPI012: P1.28 U3.15 | length 11.4
  Top Layer w0.15: P1.28 103.108,41.529 103.699,42.12 U3.15
GPI013: P1.30 U3.16 | length 13.1
  Top Layer w0.15: P1.30 95.818,41.208 103.632,41.208 104.099,41.675 U3.16
GPI014: P1.32 U3.17 | length 16
  Top Layer w0.15: P1.32 96.093,38.943 104.225,38.943 104.499,39.218 U3.17
GPI015: P1.34 U3.18 | length 17.5
  Top Layer w0.15: P1.34 98.45,33.909 103.226,38.684 104.445,38.684 104.899,39.138 U3.18
GPI016: P2.27 U3.27 | length 11.6
  Top Layer w0.15: U3.27 108.499,42.443 109.159,41.783 P2.27
GPI017: P2.25 U3.28 | length 10.7
  Top Layer w0.15: U3.28 108.899,43.18 117.983,43.18 P2.25
GPI018: P2.23 U3.29 | length 10.4
  Top Layer w0.15: U3.29 116.399,44.136 P2.23
GPI019: P2.21 U3.30 | length 11.3
  Top Layer w0.15: U3.30 114.259,44.536 P2.21
GPI020: P2.19 U3.31 | length 12.8
  Top Layer w0.15: U3.31 111.333,44.936 111.339,44.93 113.205,44.93 119.126,50.851 P2.19
GPI021: P2.17 U3.32 | length 15.1
  Top Layer w0.15: U3.32 110.493,45.336 110.566,45.263 111.499,45.263 111.582,45.18 112.541,45.18 115.621,48.26 v1(115.621,51.587)
  Bottom Layer w0.15: v1(115.621,51.587) 116.23,51.587 P2.17
GPI022: P2.15 U3.34 | length 33.2
  Top Layer w0.15: U3.34 110.947,46.136 111.455,46.644 111.455,48.564 111.596,48.705 111.596,52.386 111.997,52.787 115.699,52.787 116.243,53.331 116.243,54.956 116.582,55.296 117.5,55.296 117.932,54.864 117.932,51.308 v1(117.018,50.394)
  Bottom Layer w0.15: v1(117.018,50.394) 115.214,50.394 114.808,50.8 114.808,55.474 116.357,57.023 P2.15
GPI023: P2.13 U3.35 | length 19.5
  Top Layer w0.15: U3.35 110.544,46.536 111.201,47.193 111.201,48.81 111.346,48.955 111.346,52.681 111.702,53.037 115.418,53.037 115.743,53.362 115.743,55.803 118.156,58.217 118.156,58.593 P2.13
GPI024: P2.11 U3.36 | length 21.1
  Top Layer w0.15: U3.36 110.487,46.936 110.693,47.142 110.693,47.265 110.9,47.473 110.9,48.666 110.951,48.717 110.951,49.2 110.982,49.2 111.096,49.314 111.096,53.035 111.348,53.287 114.198,53.287 114.884,53.973 114.884,55.612 117.906,58.634 117.906,59.816 119.126,61.036 P2.11
GPI025: P2.9 U3.37 | length 22.9
  Top Layer w0.15: U3.37 110.287,47.336 110.287,47.447 110.951,47.447 110.951,49.001 111.096,49.146 111.096,53.391 112.928,53.391 117.272,57.734 117.272,62.789 P2.9
GPI026_ADC0: P2.7 U3.38 | length 24.5
  Top Layer w0.15: U3.38 110.509,47.736 110.627,47.854 110.627,49.243 110.839,49.455 110.839,53.656 112.305,53.656 116.383,57.734 116.383,64.44 P2.7
GPI027_ADC1: P2.5 U3.39 | length 58.5
  Top Layer w0.15: U3.39 109.22,48.136 109.118,48.034 109.118,43.891 109.576,43.434 116.789,43.434 118.745,45.39 120.117,45.39 120.65,45.923 120.65,76.403 120.244,76.81 118.262,76.81 117.856,76.403 117.856,70.993 P2.5
GPI028_ADC2: P2.3 U3.40 | length 39.1
  Top Layer w0.15: v1(109.753,50.47) 109.753,50.216 109.118,49.581 109.118,48.638 U3.40
  Bottom Layer w0.15: v1(109.753,50.47) 112.598,53.315 112.598,60.122 112.801,60.325 114.427,60.325 116.205,58.547 119.888,58.547 120.371,59.03 120.371,60.147 120.802,60.579 121.92,60.579 122.666,61.325 122.666,62.586 122.133,63.119 121.59,63.119 120.65,64.059 120.65,70.739 P2.3
GPI029_ADC3: P2.1 U3.41 | length 32.4
  Top Layer w0.15: U3.41 110.463,48.936 110.701,49.174 110.701,49.396 110.846,49.54 110.846,53.662 114.832,57.649 116.364,57.649 116.888,58.173 116.888,64.387 118.669,66.167 119.659,66.167 120.142,66.65 120.142,73.787 P2.1
NetC1_2: C1.2 R1.1 U1.3 | length 6
  Top Layer w0.15: R1.1 105.258,38.071 105.443,37.885 U1.3 106.977,36.514 C1.2
NetR2_1: R2.1 U3.47 | length 19.2
  Top Layer w0.15: U3.47 107.299,51.114 107.315,51.13 107.315,52.019 107.62,52.324 108.715,52.324 108.816,52.426 108.816,57.305 109.296,57.785 109.296,59.461 110.414,60.579 115.259,60.579 115.691,60.147 R2.1
NetR3_1: R3.1 U3.46 | length 26.7
  Top Layer w0.15: v1(107.699,49.022) U3.46 ; v1(111.354,58.547) R3.1
  Bottom Layer w0.15: v1(107.699,49.022) 113.792,49.022 114.001,49.231 114.001,51.206 113.594,51.613 112.166,51.613 110.2,49.646 109.322,49.646 108.899,50.069 108.899,51.876 110.515,53.492 110.515,57.709 v1(111.354,58.547)
QSPI_SCLK: U3.52 U4.6 | length 25.6
  Top Layer w0.15: v1(105.156,63.881) U4.6 ; U3.52 105.299,53.127 v1(105.842,53.67)
  Bottom Layer w0.15: v1(105.156,63.881) 103.073,65.964 101.778,65.964 101.448,65.634 101.448,55.27 101.854,54.864 104.648,54.864 v1(105.842,53.67)
QSPI_SD0: U3.53 U4.5 | length 14.5
  Top Layer w0.15: U3.53 104.899,50.955 103.861,51.994 103.861,60.249 106.223,62.611 U4.5
QSPI_SD1: U3.55 U4.2 | length 17.9
  Top Layer w0.15: U4.2 v1(102.26,65.151) ; v1(102.26,57.937) 103.302,56.896 103.302,51.793 104.099,50.996 U3.55
  Bottom Layer w0.15: v1(102.26,57.937) v1(102.26,65.151)
QSPI_SD2: U3.54 U4.3 | length 16.6
  Top Layer w0.15: U4.3 101.854,63.881 103.607,62.128 103.607,51.841 104.499,50.949 U3.54
QSPI_SD3: U3.51 U4.7 | length 23.6
  Top Layer w0.15: v1(102.311,56.363) 103.048,55.626 103.048,49.987 103.48,49.555 105.595,49.555 105.699,49.659 U3.51 ; U4.7 108.306,65.151 108.61,64.846 v1(108.61,61.544)
  Bottom Layer w0.15: v1(102.311,56.363) 106.54,60.592 107.658,60.592 v1(108.61,61.544)
QSPI_SS: R4.1 R5.2 U3.56 U4.1 | length 24.4
  Top Layer w0.15: R5.2 101.234,67.68 U4.1 98.755,66.421 98.577,66.243 98.577,63.602 98.806,63.373 101.778,63.373 102.488,62.663 R4.1 102.488,59.08 103.353,58.216 103.353,51.587 103.699,51.241 U3.56
RUN: P2.29 U3.26 | length 13.1
  Top Layer w0.15: U3.26 108.099,42.39 109.245,41.244 117.125,41.244 P2.29
SWCLK: P2.33 U3.24 | length 16.8
  Top Layer w0.15: U3.24 107.299,42.268 107.319,42.248 107.319,41.026 107.731,40.615 111.684,40.615 118.135,34.163 P2.33
SWD: P2.31 U3.25 | length 15.4
  Top Layer w0.15: U3.25 107.699,41.046 107.752,40.994 112.194,40.994 116.484,36.703 P2.31
USB_BOOT: P3.1 R5.1 | length 5.7
  Top Layer w0.15: P3.1 99.68,72.659 R5.1
USB_D+: J1.3 R2.2 | length 27.3
  Top Layer w0.15: J1.3 111.307,78.384 115.418,78.384 116.129,77.673 116.129,58.318 116.078,58.268 115.113,58.268 114.941,58.439 R2.2
USB_D-: J1.2 R3.2 | length 44.8
  Top Layer w0.15: R3.2 v1(113.411,59.512)
  Bottom Layer w0.15: J1.2 109.743,77.993 110.134,78.384 121.92,78.384 122.916,77.388 122.916,59.162 122.047,58.293 114.63,58.293 v1(113.411,59.512)
VBUS: C14.1 J1.1 U2.3 | length 23.8
  Top Layer w0.15: C14.1 109.093,73.121 109.093,75.921 ; J1.1 109.093,75.921 ; U2.3 115.061,67.555 115.857,68.351 115.857,75.202 115.773,75.286 109.728,75.286 109.093,75.921
XIN: C13.2 U1.1 U3.20 | length 9.7
  Top Layer w0.15: U3.20 105.699,42.393 105.689,42.383 105.689,41.046 106.376,40.36 107.852,40.36 107.852,39.827 108.094,39.585 U1.1 111.691,39.585 C13.2
XOUT: R1.2 U3.21 | length 7.8
  Top Layer w0.15: v1(102.616,40.386) 102.616,40.234 103.226,39.624 R1.2 ; U3.21 106.099,41.831 v1(106.502,41.427)
  Bottom Layer w0.15: v1(102.616,40.386) 103.657,41.427 v1(106.502,41.427)
pads on no net: J1.4
copper on no net: | length 173.1
  Top Layer w0.254: 89.027,28.702 124.027,28.702 124.027,80.264 89.027,80.264 89.027,28.702

## Polygon pours and split planes (outlines as drawn)
GND on Top Layer "GND_L01_P000" (solid, pour order 0): 89.027,80.264 124.027,80.264 124.027,28.702 89.027,28.702
GND on Bottom Layer "GND_L02_P001" (solid, pour order 1): 89.027,80.264 123.952,80.264 123.952,28.829 124.079,28.702 89.027,28.702

## Silkscreen, mask and mechanical layers (free items; w line width, h text height)
Top Overlay:
  text "Raspberry Pi" at 101.219,33.226 h1
  text "RP2040 Minimal" at 100.711,30.988 h1